# Altium PCB Drone_v1.0 - Copy.PcbDoc
Units mm, origin at the board's own origin, x right, y up, seen from the top; angles counter-clockwise.
Board outline 116.84 x 116.84 mm, 2 copper layers (Top Layer, Bottom Layer); 97 components, 66 nets, 314 pads, 83 vias.
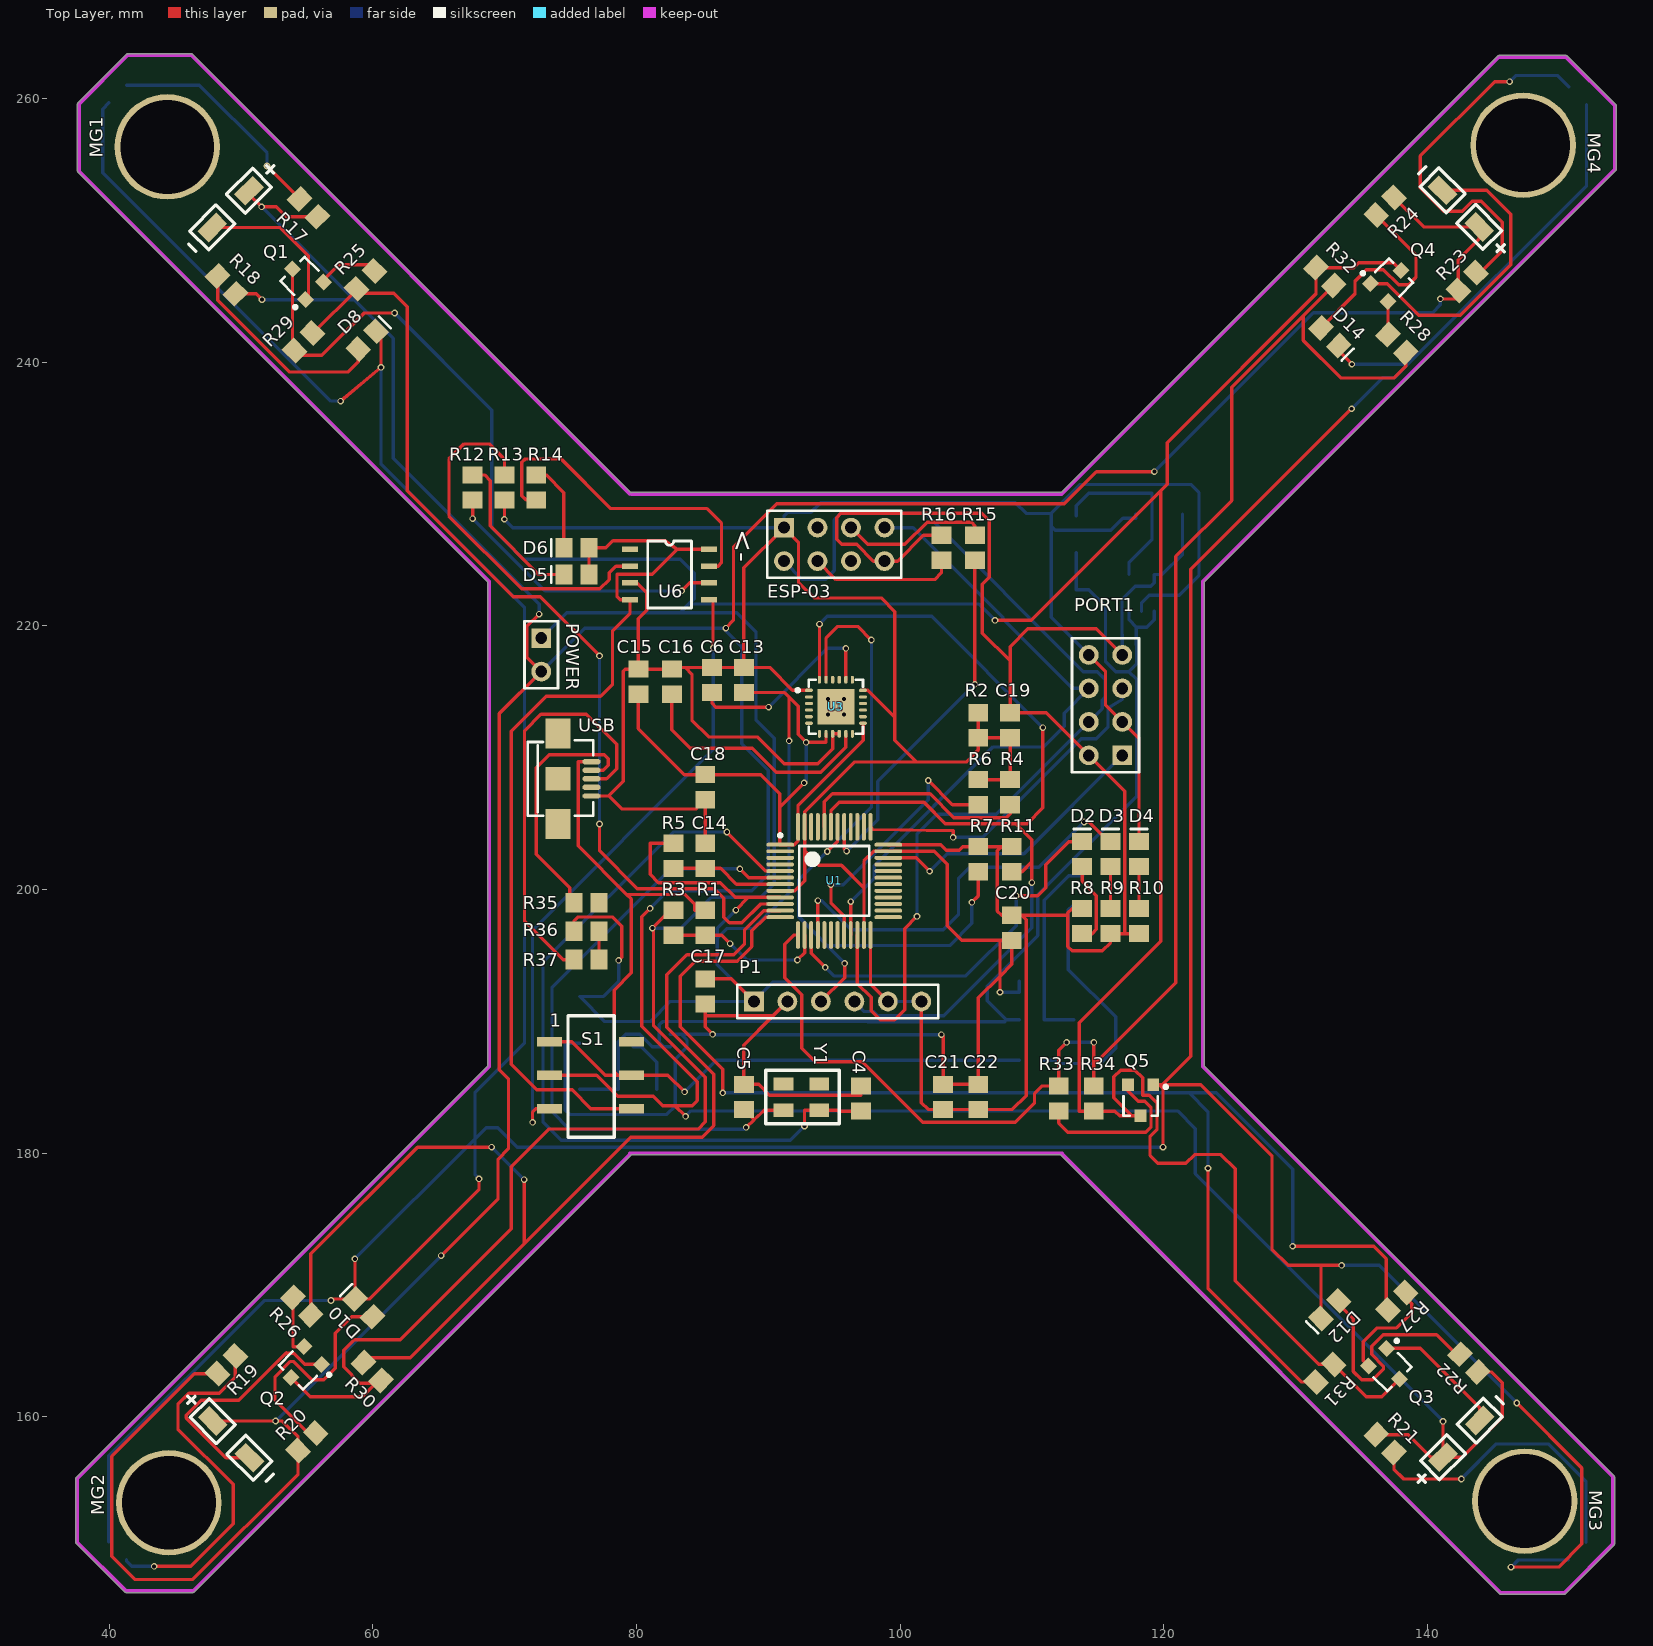
[diagram p0: Top Layer view]
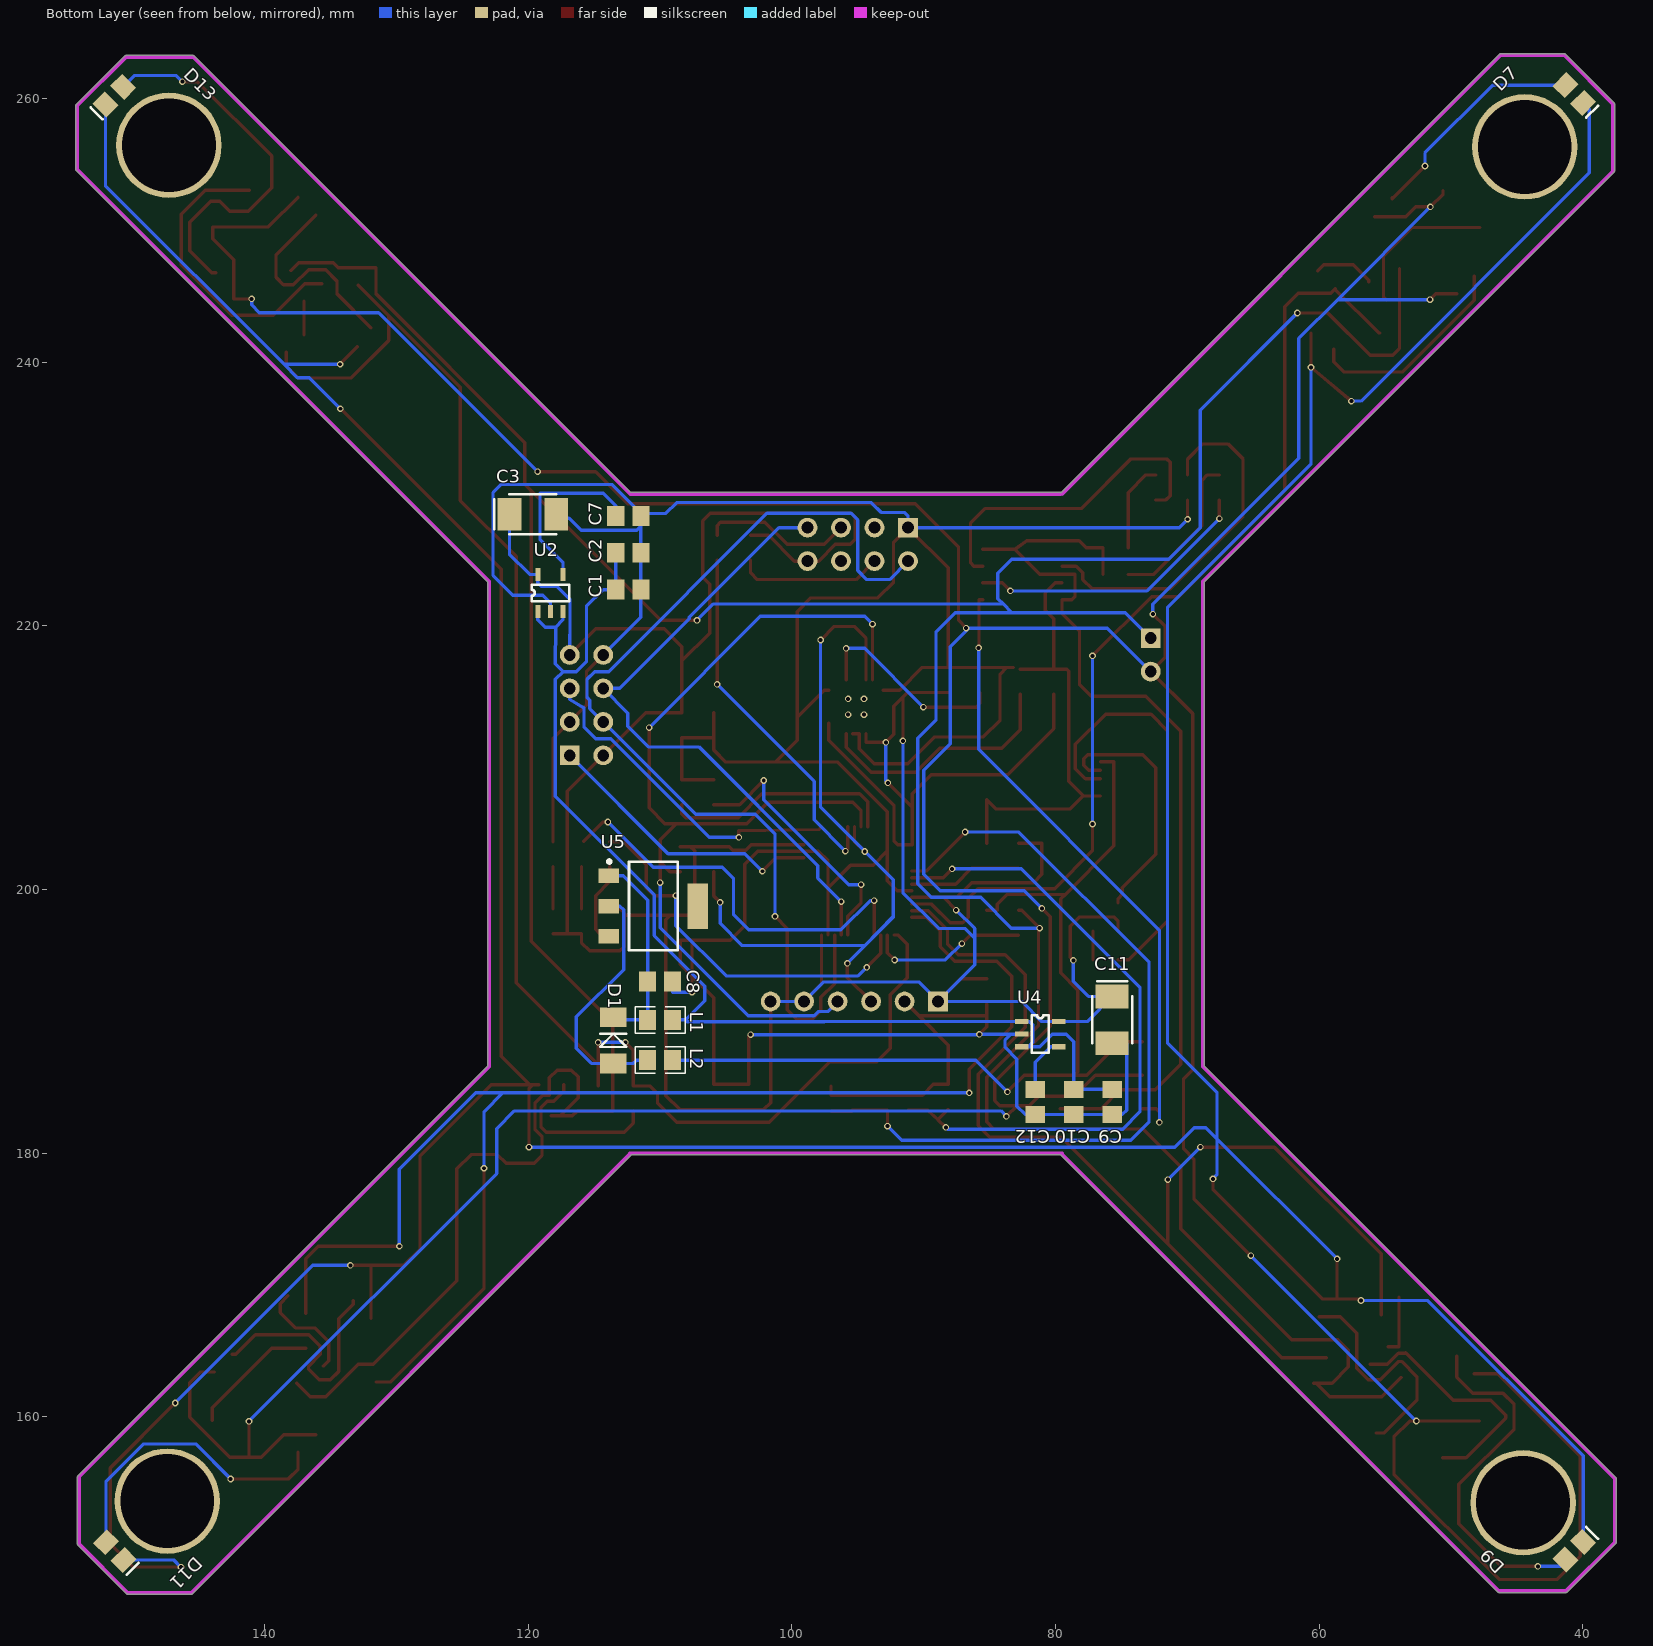
[diagram p1: Bottom Layer view, seen from below]

## Layer stack, top to bottom
Top Layer: signal copper 0.0356
Dielectric: dielectric 0.32, FR-4, Dk 4.8
Bottom Layer: signal copper 0.0356

## Board outline
41.185,146.722 37.502,150.405 37.502,150.404 cw(c37.592,150.495) 37.465,150.495 37.465,155.321 cw(c37.592,155.321) 37.502,155.412 37.502,155.411 68.707,186.616 68.707,223.34 37.629,254.418 37.629,254.417 cw(c37.719,254.508) 37.592,254.508 37.592,259.588 cw(c37.719,259.588) 37.629,259.679 37.629,259.678 41.312,263.361 41.311,263.361 cw(c41.402,263.271) 41.402,263.398 46.228,263.398 cw(c46.228,263.271) 46.319,263.361 46.318,263.361 46.319,263.361 79.569,230.111 cw(c79.632,230) 79.632,230.127 112.218,230.127 145.325,263.234 145.324,263.234 cw(c145.415,263.144) 145.415,263.271 150.495,263.271 cw(c150.495,263.144) 150.586,263.234 150.585,263.234 154.268,259.551 154.268,259.552 cw(c154.178,259.461) 154.305,259.461 154.305,254.635 cw(c154.178,254.635) 154.268,254.544 154.268,254.545 123.063,223.34 123.063,186.616 154.141,155.538 154.141,155.539 cw(c154.051,155.448) 154.178,155.448 154.178,150.368 cw(c154.051,150.368) 154.141,150.277 154.141,150.278 150.458,146.595 150.459,146.595 cw(c150.368,146.685) 150.368,146.558 145.542,146.558 cw(c145.542,146.685) 145.451,146.595 112.179,179.867 cw(c112.27,179.958) 112.175,179.873 79.596,179.873 cw(c79.502,179.959) 79.592,179.869 46.445,146.722 46.446,146.722 cw(c46.355,146.812) 46.355,146.685 41.275,146.685 cw(c41.275,146.812)

## Design rules (kind name [scope] priority, off if disabled: settings)
Clearance [All] p1: gap=0.2
PolygonConnect [All] p1: connectstyle=Relief reliefconductorwidth=0.254 reliefentries=4 polygonreliefangle="90 Angle" airgapwidth=0.254
RoutingVias [All] p1: holewidth=0.711 width=1.27 viastyle="Through Hole" minholewidth=0.711 minwidth=1.27 maxholewidth=0.711 maxwidth=1.27
SolderMaskExpansion [All] p1: expansion=0.102
Width [All] p1: maxlimit=0.254 minlimit=0.254 preferedwidth=0.254
28 further rules are at their usual default settings.

## Components (designator, comment, footprint, x,y, rotation, side; value= is the part's Value field where it differs from the comment)
C1 "0402 12pF" 0805-2 112.395,222.758 r180 bottom
C2 "0402 12pF" 0805-2 112.395,225.552 r180 bottom
C3 "Cap Pol" CAP-3528 119.634,228.473 r180 bottom
C4 "0402 12pF" 0805-2 97.028,184.15 r90 top
C5 "0402 12pF" 0805-2 88.138,184.277 r270 top
C6 "0402 12pF" 0805-2 85.725,215.9 r270 top
C7 "0402 12pF" 0805-2 112.395,228.346 r180 bottom
C8 "0402 12pF" 0805-2 109.982,193.04 r180 bottom
C9 "0402 12pF" 0805-2 75.692,183.896 r270 bottom
C10 "0402 12pF" 0805-2 78.613,183.896 r270 bottom
C11 "Cap Pol" CAP-3528 75.692,190.119 r270 bottom
C12 "0402 12pF" 0805-2 81.534,183.896 r270 bottom
C13 "0402 12pF" 0805-2 88.138,215.9 r90 top
C14 "Cap" 0805-2 85.217,202.565 r90 top
C15 "0402 12pF" 0805-2 80.137,215.773 r90 top
C16 "0402 12pF" 0805-2 82.677,215.773 r90 top
C17 "Cap" 0805-2 85.217,192.278 r90 top
C18 "Cap" 0805-2 85.217,207.772 r90 top
C19 "Cap" 0805-2 108.331,212.471 r90 top
C20 "Cap" 0805-2 108.458,197.104 r90 top
C21 "0402 12pF" 0805-2 103.251,184.277 r90 top
C22 "0402 12pF" 0805-2 105.918,184.277 r90 top
D1 "Diode" DIODE-1206 113.538,186.817 r90 bottom
D2 "LED0" LED_0805 113.792,202.692 r90 top
D3 "LED0" LED_0805 115.951,202.692 r90 top
D4 "LED0" LED_0805 118.11,202.692 r90 top
D5 "LED0" LED_0805 75.438,223.901 r180 top
D6 "LED0" LED_0805 75.438,225.933 r180 top
D7 "LED0" LED_0805 40.64,260.35 r225 bottom
D8 "LED0" LED_0805 59.563,241.681 r45 top
D9 "LED0" LED_0805 40.64,149.86 r135 bottom
D10 "LED0" LED_0805 59.309,168.275 r135 top
D11 "LED0" LED_0805 151.348,149.824 r225 bottom
D12 "LED0" LED_0805 132.588,168.148 r225 top
D13 "LED0" LED_0805 151.384,260.223 r315 bottom
D14 "LED0" LED_0805 132.588,241.935 r315 top
ESP-03 "ESP03" PCBComponent_1 91.186,224.917 r0 top (schematic designator Header)
L1 "Inductor" 0805-1 109.982,190.119 r180 bottom
L2 "Inductor" 0805-1 109.982,187.071 r180 bottom
MG1 "MOTOR AC" Motor 45.212,255.524 r315 top
MG2 "MOTOR AC" Motor 45.339,154.305 r45 top
MG3 "MOTOR AC" Motor 146.558,154.432 r135 top
MG4 "MOTOR AC" Motor 146.431,255.651 r225 top
P1 "BMP280" HDR1X6 88.9,191.516 r0 top
PORT1 "PORT" HDR2X4_CEN 116.84,210.185 r90 top
POWER "Header 2" HDR1X2 72.771,219.075 r270 top (schematic designator POWER1)
Q1 "MOSFET-N" SOT-23 54.737,246.253 r45 top
Q2 "MOSFET-N" SOT-23 54.61,163.83 r135 top
Q3 "MOSFET-N" SOT-23 137.033,163.703 r225 top
Q4 "MOSFET-N" SOT-23 137.16,246.126 r315 top
Q5 "MOSFET-N" SOT-23 118.237,184.023 r180 top
R1 "Res1" 0805-2 85.217,197.485 r90 top
R2 "Res1" 0805-2 105.918,212.471 r270 top
R3 "Res1" 0805-2 82.804,197.485 r90 top
R4 "Res1" 0805-2 108.331,207.391 r270 top
R5 "Res1" 0805-2 82.804,202.565 r90 top
R6 "Res1" 0805-2 105.918,207.391 r270 top
R7 "Res1" 0805-2 105.918,202.311 r270 top
R8 "Res1" 0805-2 113.792,197.612 r90 top
R9 "Res1" 0805-2 115.951,197.612 r270 top
R10 "Res1" 0805-2 118.11,197.612 r270 top
R11 "Res1" 0805-2 108.458,202.311 r270 top
R12 "Res1" 0805-2 67.564,230.505 r90 top
R13 "Res1" 0805-2 69.977,230.505 r90 top
R14 "Res1" 0805-2 72.39,230.505 r90 top
R15 "Res1" 0805-2 105.664,225.933 r90 top
R16 "Res1" 0805-2 103.124,225.933 r90 top
R17 "Res1" 0805-2 55.118,251.714 r135 top
R18 "Res1" 0805-2 48.895,245.872 r135 top
R19 "Res1" 0805-2 48.895,163.957 r45 top
R20 "Res1" 0805-2 54.991,158.115 r45 top
R21 "Res1" 0805-2 136.779,157.988 r315 top
R22 "Res1" 0805-2 143.129,164.084 r135 top
R23 "Res1" 0805-2 143.002,246.126 r45 top
R24 "Res1" 0805-2 136.779,251.841 r225 top
R25 "Res1" 0805-2 59.436,246.253 r225 top
R26 "Res1" 0805-2 54.61,168.402 r315 top
R27 "Res1" 0805-2 137.668,168.783 r225 top
R28 "Res1" 0805-2 137.668,241.427 r315 top
R29 "Res1" 0805-2 54.737,241.554 r45 top
R30 "Res1" 0805-2 59.944,163.449 r135 top
R31 "Res1" 0805-2 132.207,163.322 r225 top
R32 "Res1" 0805-2 132.207,246.507 r315 top
R33 "Res1" 0805-2 112.014,184.15 r90 top
R34 "Res1" 0805-2 114.681,184.15 r90 top
R35 "Res1" 0805-2 76.2,199.009 r180 top
R36 "Res1" 0805-2 76.2,196.85 r180 top
R37 "Res1" 0805-2 76.2,194.691 r180 top
S1 "Switch" 开关 74.803,181.229 r0 top
U1 "STM32F103C" LQFP-48_M 94.996,200.66 r0 top
U2 "MIC5219" SOT25-5 119.253,221.107 r90 bottom
U3 "MPU6050" QFN50P400X400X90-24N 95.123,213.868 r0 top
U4 "MIC5219" SOT25-5 82.55,189.992 r180 bottom
U5 "ME2108A" SOT-223 110.49,198.755 r270 bottom
U6 "TP4056" SOP8 79.502,225.806 r0 top
USB "USB_M" USB_MICRO 74.041,208.407 r270 top (schematic designator J1)
Y1 "Micro 3215" SMDXTAL3225 93.853,183.261 r180 top

## Footprints (in the part's own frame and the unit in brackets; to place one, negate y for a bottom-side part, rotate by r counter-clockwise, add the part's x,y. Pads: shape width x height; smd on the part's side, far side on the other; paste and mask are expansions set on the pad)
0805-1 [mm] "贴片带丝印"
  rect 1.3x1.5 smd: 1(-0.95,0) 2(0.95,0)
  silkscreen extent -1.91,-1.02 1.9,1.02, body extent -1.14,-0.51 1.14,0.51, height 1
0805-2 [mm] "贴片无丝印"
  rect 1.3x1.5 smd: 1(-0.95,0) 2(0.95,0)
CAP-3528 [mm] "钽电容"
  rect 1.8x2.5 smd: 1(-1.778,0) 2(1.778,0)
  silkscreen extent -2.92,-1.52 1.78,1.52, body extent -1.91,-1.4 1.91,1.4, height 1.1
DIODE-1206 [mm] "玻璃封装二极管"
  rect 1.5x2 smd: 1(0,0) 2(3.5,0)
  silkscreen extent 1.25,-1 2.25,1
HDR1X2 [mm] "Connector; Header; 2 Position"
  rect 1.5x1.5 hole 0.9: 1(0,0)
  round 1.5 hole 0.9: 2(2.54,0)
  silkscreen extent -1.27,-1.27 3.81,1.27
HDR1X6 [mm] "Connector; Header; 6 Position"
  rect 1.5x1.5 hole 0.9: 1(0,0)
  round 1.5 hole 0.9: 2(2.54,0) 3(5.08,0) 4(7.62,0) 5(10.16,0) 6(12.7,0)
  silkscreen extent -1.27,-1.27 13.97,1.27
HDR2X4_CEN [mm] "Connector; Header; 4x2 Position"
  rect 1.5x1.5 hole 0.9: 1(0,0)
  round 1.5 hole 0.9: 2(2.54,0) 3(5.08,0) 4(7.62,0) 5(0,2.54) 6(2.54,2.54) 7(5.08,2.54) 8(7.62,2.54)
  silkscreen extent -1.27,-1.27 8.89,3.81
LED_0805 [mm] "贴片二极管"
  rect 1.3x1.5 smd: 1(-0.95,0) 2(0.95,0)
  silkscreen extent 1.91,-0.63 1.91,0.64
LQFP-48_M [mm] "Thin QFP, 48-Leads, Body 7x7mm, Pitch 0.5mm, IPC Low Density"
  oval 2.1x0.3 smd: 1(-4.1,2.75) 2(-4.1,2.25) 3(-4.1,1.75) 4(-4.1,1.25) 5(-4.1,0.75) 6(-4.1,0.25) 7(-4.1,-0.25) 8(-4.1,-0.75) 9(-4.1,-1.25) 10(-4.1,-1.75) 11(-4.1,-2.25) 12(-4.1,-2.75) 25(4.1,-2.75) 26(4.1,-2.25) 27(4.1,-1.75) 28(4.1,-1.25) 29(4.1,-0.75) 30(4.1,-0.25) 31(4.1,0.25) 32(4.1,0.75) 33(4.1,1.25) 34(4.1,1.75) 35(4.1,2.25) 36(4.1,2.75)
  oval 0.3x2.1 smd: 13(-2.75,-4.1) 14(-2.25,-4.1) 15(-1.75,-4.1) 16(-1.25,-4.1) 17(-0.75,-4.1) 18(-0.25,-4.1) 19(0.25,-4.1) 20(0.75,-4.1) 21(1.25,-4.1) 22(1.75,-4.1) 23(2.25,-4.1) 24(2.75,-4.1) 37(2.75,4.1) 38(2.25,4.1) 39(1.75,4.1) 40(1.25,4.1) 41(0.75,4.1) 42(0.25,4.1) 43(-0.25,4.1) 44(-0.75,4.1) 45(-1.25,4.1) 46(-1.75,4.1) 47(-2.25,4.1) 48(-2.75,4.1)
  silkscreen extent -4.22,-2.65 2.65,3.57, body extent -3.5,-3.5 3.5,3.5, height 1.6
Motor [mm]
  round 8 hole 7.1: 0(-1.143,0)
  rect 1.2x2 smd: 1(5.588,2.032) 2(5.588,-1.905)
  silkscreen extent 4.57,-4.06 6.6,4.7
PCBComponent_1 [mm]
  rect 1.5x1.5 hole 0.9: 1(0,2.54)
  round 1.5 hole 0.9: 2(2.54,2.54) 3(5.08,2.54) 4(7.62,2.54) 5(7.62,0) 6(5.08,0) 7(2.54,0) 8(0,0)
  silkscreen extent -1.27,-1.27 8.89,3.81
QFN50P400X400X90-24N [mm] "QFN, 24-Leads, Body 4.1x4.1mm (max), Pitch 0.50mm, IPC Medium Density"
  oval 0.6x0.25 smd: 1(-2.05,1.25) 2(-2.05,0.75) 3(-2.05,0.25) 4(-2.05,-0.25) 5(-2.05,-0.75) 6(-2.05,-1.25) 13(2.05,-1.25) 14(2.05,-0.75) 15(2.05,-0.25) 16(2.05,0.25) 17(2.05,0.75) 18(2.05,1.25)
  oval 0.25x0.6 smd: 7(-1.25,-2.05) 8(-0.75,-2.05) 9(-0.25,-2.05) 10(0.25,-2.05) 11(0.75,-2.05) 12(1.25,-2.05) 19(1.25,2.05) 20(0.75,2.05) 21(0.25,2.05) 22(-0.25,2.05) 23(-0.75,2.05) 24(-1.25,2.05)
  rect 2.8x2.7 smd: 25(0,0)
  silkscreen extent -3.02,-2.05 2.05,2.05, body extent -2.05,-2.05 2.05,2.05, height 0.9
SMDXTAL3225 [mm]
  rect 1.5x1 smd: 1(0,0) 2(2.7,0) 3(2.7,-2) 4(0,-2)
  silkscreen extent -1.52,-3.05 4.06,1.02
SOP8 [mm]
  rect 1.2x0.42 smd: 1(0,0) 2(0,-1.27) 3(0,-2.54) 4(0,-3.81) 5(6,-3.81) 6(6,-2.54) 7(6,-1.27) 8(6,0)
  silkscreen extent 1.34,-4.44 4.67,0.64
SOT25-5 [mm]
  rect 1x0.4 smd: 1(0,0) 2(0,-0.95) 3(0,-1.9) 4(2.8,-1.9) 5(2.8,0)
  silkscreen extent 0.76,-2.38 2.03,0.48
SOT-23 [mm]
  rect 0.9x0.95 smd: 1(-0.95,-1.175) 2(0.95,-1.175) 3(0,1.175)
  silkscreen extent -2.03,-1.14 1.3,1.18
SOT-223 [mm]
  rect 1.1x1.55 smd: 1(-2.3,-3.375) 2(0,-3.375) 3(2.3,-3.375)
  rect 3.45x1.55 smd: 4(0,3.375)
  silkscreen extent -3.5,-3.48 3.35,1.85, body extent -3.3,-3.94 3.3,3.43, height 0.8
USB_MICRO [mm] "USB方孔"
  oct 0.4x1.35 smd: 1(-1.3,2.54) 2(-0.65,2.54) 3(0,2.54) 4(0.65,2.54) 5(1.3,2.54)
  rect 2.286x1.9 smd: 6(3.429,0) 7(-3.429,0)
  rect 1.8x1.9 smd: 8(0,0)
  silkscreen extent -2.92,-2.29 2.79,2.67
开关 [mm]
  rect 1.9x0.7 smd: 1(-1.397,7.239) 2(-1.397,4.699) 3(-1.397,2.159) 4(4.826,7.239) 5(4.826,4.699) 6(4.826,2.159)
  silkscreen extent 0,0 3.5,9.2

## Part data
C1 C2 C4 C5 C6 C7 C8 C9 C10 C12 C13 C15 C16 C21 C22: library part Cap, "Capacitor"
C3 C11: "极性电解电容"
C14 C17 C18 C19 C20: "无极性电容"
D1: "二极管"
D2 D3 D4 D5 D6 D7 D8 D9 D10 D11 D12 D13 D14: "发光二极管"
ESP-03: library part Hearder
L1 L2: "电感"
P1: library part "Header 6", "Header, 6-Pin"
PORT1: library part "Header 4X2A", "Header, 4-Pin, Dual row"
POWER: "Header, 2-Pin"
Q1 Q2 Q3 Q4 Q5: "N-Channel MOSFET"
R1 R2 R3 R4 R5 R6 R7 R8 R9 R10 R11 R12 R13 R14 R15 R16 R17 R18 R19 R20 R21 R22 R23 R24 R25 R26 R27 R28 R29 R30 R31 R32 R33 R34 R35 R36 R37: "贴片电阻"
S1: library part 双刀双柄开关
U1: "STM32单片机48引脚"
USB: "MicroUSB接口"
Y1: library part XTAL, "Crystal Oscillator"

## Via types
v1: diameter 0.5, hole 0.3, Top Layer to Bottom Layer, 79 vias
v2: diameter 0.5, hole 0.3, Top Layer to Bottom Layer, tented top, 4 vias

## Nets (pads, with @x,y where several pads share a name; then routed paths per layer and width w, separated by ;. In a path a pad name is that pad's centre, name@x,y a point inside that pad or via, vN(x,y) a via of type N, cw(c..) or ccw(c..) an arc to the next point about the centre after c; other vN are vias at no path point)
3V3: C3.1 C11.1 C13.1 C15.1 C17.2 C18.2 C19.2 C20.2 C21.1 C22.1 ESP-03.5 P1.1 P1.5 P1.6 PORT1.4 PORT1.5 R5.2 R7.1 R8.2 R9.2 R10.2 R11.1 R16.2 R36.2 U1.1 U1.9 U1.24 U1.36 U1.48 U2.5 U3.8 U3.13 U4.5 | length 290.4
  Top Layer w0.254: R36.2 75.25,197.612 75.568,197.93 78.168,197.93 78.867,197.231 78.867,194.869 v1(78.638,194.64) ; C15.1 80.137,212.217 83.632,208.722 C18.2 89.408,208.722 90.856,207.274 90.856,206.248 ; R5.2 81.026,203.515 81.026,201.168 81.661,200.533 86.36,200.533 87.483,199.41 88.488,199.41 ; C17.2 87.188,193.228 P1.1 ; v1(87.528,198.45) 88.488,199.41 ; C13.1 91.222,214.95 91.567,214.605 ; U1.9 88.488,199.41 ; v1(91.567,211.277) 91.567,214.605 ; v1(92.71,208.102) 90.856,206.248 ; U3.8 94.373,211.176 v1(92.862,211.176) 92.253,211.785 92.253,213.919 91.567,214.605 ; U3.13 97.18,212.618 97.18,211.328 92.246,206.394 U1.48 92.246,203.708 91.948,203.41 U1.1 90.856,203.41 90.856,206.248 ; U1.24 97.746,192.83 P1.5 ; U1.36 103.085,203.41 103.495,203 104.467,203 104.728,203.261 R7.1 107.681,203.261 ; P1.6 101.6,183.835 102.108,183.327 C21.1 C22.1 108.512,183.327 109.55,184.365 109.55,197.724 109.22,198.054 ; R16.2 101.763,226.883 99.797,224.917 ESP-03.5 97.968,224.917 96.698,226.187 95.555,226.187 95.174,226.568 95.174,228.219 95.504,228.549 106.172,228.549 106.756,227.965 106.756,223.698 106.223,223.164 106.223,219.456 108.331,217.348 ; R11.1 107.681,203.261 ; R8.2 113.03,198.562 112.7,198.232 112.7,198.054 ; PORT1.4 114.859,219.786 109.677,219.786 108.331,218.44 108.331,217.348 ; R10.2 117.028,196.662 ; 107.681,203.261 107.366,202.946 107.366,198.374 107.686,198.054 C20.2 109.22,198.054 ; 108.331,217.348 C19.2 111.064,213.421 PORT1.5 117.028,207.457 117.028,196.662 ; 109.22,198.054 112.7,198.054 ; 112.7,198.054 112.7,195.682 113.03,195.351 115.316,195.351 115.951,195.986 R9.2 117.028,196.662
  Bottom Layer w0.254: v1(78.638,194.64) 78.638,193.04 77.495,191.897 C11.1 77.597,189.992 U4.5 81.026,189.992 82.55,191.516 P1.1 ; v1(87.528,198.45) 86.131,197.053 86.131,196.317 ; v1(91.567,211.277) 91.567,199.771 88.849,197.053 86.868,197.053 86.131,196.317 ; v1(92.71,208.102) 92.862,208.255 v1(92.862,211.176) ; P1.6 P1.5 97.58,192.996 90.38,192.996 P1.1 ; PORT1.4 116.84,219.329 116.815,219.354 116.815,221.996 117.831,223.012 118.999,223.012 119.253,223.266 U2.5 119.888,223.907 121.412,225.431 C3.1 ; 86.131,196.317 86.131,194.285 P1.1
AGND: POWER.1 Q1.3 Q2.3 Q3.3 Q4.3 Q5.3 R3.2 R29.1 R30.1 R31.1 R32.1 R34.1 | length 339.1
  Top Layer w0.254: Q2.3 55.234,161.544 59.182,161.544 R30.1@60.198,162.56 ; Q1.3 53.906,241.041 R29.1 54.41,240.538 56.134,240.538 59.334,243.738 v1(61.646,243.738) ; R30.1@60.398,162.56 R30.1@60.198,162.56 ; R3.2 82.56,198.435 81.28,197.155 81.28,189.713 85.217,185.776 85.217,182.378 84.68,181.842 73.333,181.842 70.485,178.994 70.485,174.269 62.078,165.862 58.591,165.862 57.785,165.056 57.785,163.793 59.018,162.56 R30.1@60.198,162.56 ; v1(107.188,220.421) 109.927,220.421 119.761,230.255 ; Q5.3 117.558,182.848 ; Q3.3@137.541,162.56 136.525,161.544 135.328,161.544 R31.1 131.738,163.994 125.4,170.332 125.4,178.816 124.308,179.908 122.326,179.908 121.666,179.248 119.532,179.248 118.948,179.832 118.948,181.305 119.478,181.835 119.478,183.79 118.872,184.396 118.389,184.396 118.389,185.725 117.805,186.309 116.713,186.309 116.205,185.801 116.205,184.201 117.558,182.848 ; Q4.3 137.405,247.542 134.772,247.542 134.409,247.179 R32.1 131.535,245.186 120.24,233.891 120.24,230.734 119.761,230.255 ; 117.558,182.848 116.633,182.848 116.281,183.2 R34.1 113.589,183.2 113.589,189.916 119.761,196.088 119.761,230.255
  Bottom Layer w0.254: v1(61.646,243.738) 69.012,236.372 69.012,227.457 71.399,225.069 83.312,225.069 84.379,224.003 84.379,222.072 83.975,221.669 ; POWER.1 74.701,221.005 83.312,221.005 ; v1(81.204,197.079) 83.337,197.079 85.674,199.415 89.408,199.415 90.449,200.457 90.449,211.487 89.056,212.881 89.056,219.554 87.605,221.005 83.312,221.005 ; v1(107.188,220.421) 105.941,221.669 83.975,221.669 ; 83.312,221.005 83.975,221.669
BAT: MG1.1 MG2.1 MG3.1 MG4.1 POWER.2 R17.1 R18.1 R19.1 R20.1 R21.1 R22.1 R23.1 R24.1 S1.2 | length 419
  Top Layer w0.254: MG2.1 v1(52.629,159.693) 53.122,159.693 54.319,158.496 R20.1 54.319,155.665 46.33,147.676 41.935,147.676 40.183,149.428 40.183,157.005 46.463,163.285 R19.1 ; R18.1 51.142,245.2 v1(51.587,244.754) ; MG1.1 50.6,252.749 v1(51.559,251.79) 52.68,251.79 53.428,251.042 R17.1 ; v1(65.173,172.237) 69.494,176.559 69.494,179.553 70.282,180.34 70.282,185.649 69.596,186.334 69.596,213.36 POWER.2 71.679,217.627 71.679,219.964 v1(72.613,220.898) ; S1.2 76.962,185.928 78.562,184.328 81.28,184.328 81.991,183.617 82.906,183.617 ; v1(81.026,198.577) 80.391,197.942 80.391,189.628 84.604,185.415 84.604,184 84.221,183.617 82.906,183.617 ; v1(83.718,182.804) 82.906,183.617 ; v1(86.766,219.837) 87.351,220.421 87.351,225.984 90.627,229.26 112.446,229.26 114.884,231.699 v1(119.278,231.699) ; R21.1 138.52,158.66 140.233,156.946 MG3.1 ; R24.1 139.701,250.263 MG4.1 143.917,249.377 142.33,247.791 R23.1 142.33,244.805 v1(140.97,244.805) ; v1(141.17,159.671) MG3.1 ; R22.1 144.842,163.412 145.669,162.585 145.669,159.995 142.621,156.946 MG3.1
  Bottom Layer w0.254: v1(51.559,251.79) 58.594,244.754 ; v1(51.587,244.754) 58.594,244.754 ; v1(52.629,159.693) v1(65.173,172.237) ; v1(72.613,220.898) 72.613,221.646 61.544,232.715 61.544,241.805 58.594,244.754 ; POWER.2 76.073,219.837 v1@86.589,219.837 ; v1(81.026,198.577) 82.369,199.92 88.744,199.92 89.992,201.168 89.992,209.067 87.986,211.074 87.986,218.44 v1@86.589,219.837 ; v1(83.718,182.804) 84.125,183.21 121.031,183.21 122.377,181.864 122.377,178.464 v1(141.17,159.671) ; v1(86.766,219.837) v1@86.589,219.837 ; v1(119.278,231.699) 131.343,243.764 140.386,243.764 140.97,244.348 v1(140.97,244.805)
CBAT: S1.3 U6.5 | length 47.8
  Top Layer w0.254: v1(72.111,182.347) 72.111,183.134 72.365,183.388 S1.3 ; U6.5 85.801,221.996 85.801,218.364 v1(85.827,218.338)
  Bottom Layer w0.254: v1(72.111,182.347) 72.111,196.926 85.827,210.642 v1(85.827,218.338)
GND: C1.2 C2.2 C3.2 C4.2 C5.1 C6.1 C7.2 C8.2 C9.2 C10.2 C11.2 C12.2 C13.2 C14.2 C15.2 C16.2 C17.1 C18.1 C19.1 C20.1 C21.2 C22.2 D4.2 ESP-03.1 P1.2 PORT1.2 PORT1.8 R2.1 R2.2 R4.1 R6.1 R13.1 U1.8 U1.23 U1.35 U1.47 U2.2 U3.1 U3.9 U3.10 U3.18 U4.2 U6.3 USB.5 | length 360.3
  Top Layer w0.254: v1(69.977,228.092) R13.1 ; USB.5 77.872,207.107 ; U6.3 80.01,223.266 80.772,222.504 80.772,221.183 80.137,220.548 C15.2 ; C16.2 C15.2 ; C16.2@83.185,216.85 C6.1 C13.2 ; 83.724,216.82 84.201,216.342 84.201,212.852 85.471,211.582 89.157,211.582 91.189,209.55 93.755,209.55 94.873,210.668 U3.9 U3.10 ; C17.1 85.217,190.424 ; C14.2 C18.1 84.516,206.121 78.858,206.121 77.872,207.107 ; v1@85.776,189.001 v1(85.776,189.027) 85.217,189.586 85.217,190.424 ; U1.8 91.996,199.91 92.746,200.66 92.746,202.935 ; P1.2 90.348,190.424 ; U3.1 91.826,215.118 90.094,216.85 C13.2 ; C4.2 97.028,184.404 90.079,184.404 89.256,185.227 C5.1 88.138,188.214 90.348,190.424 ; U3.18 97.536,215.118 99.593,213.061 ; U1.23 97.246,200.152 ; 101.244,209.677 99.593,211.328 99.593,213.061 ; v1(103.124,189.001) 103.251,188.874 C21.2 C22.2 105.918,191.795 107.569,193.446 ; R6.1 R4.1 C19.1 R2.2 ; R2.1 R2.2 ; v1(107.569,192.217) 107.569,193.446 ; PORT1.8 115.57,216.535 115.57,213.995 PORT1.2 118.11,211.455 D4.2 ; 77.872,207.107 78.994,208.229 78.994,216.571 79.146,216.723 C15.2 ; 85.217,190.424 90.348,190.424 ; C13.2 88.138,224.409 ESP-03.1 92.278,226.365 92.278,223.317 93.472,222.123 98.552,222.123 99.593,221.082 99.593,213.061 ; 92.746,202.935 U1.47 92.746,205.903 96.52,209.677 105.004,209.677 105.918,210.591 R2.2 ; 92.746,202.935 93.828,201.854 95.544,201.854 97.246,200.152 ; 97.246,200.152 97.246,202.173 97.983,202.91 U1.35 102.576,202.91 103.556,201.93 103.556,197.246 104.648,196.154 107.569,196.154 ; 107.569,193.446 107.569,196.154 ; 107.569,193.446 108.458,194.335 C20.1 107.569,196.154
  Bottom Layer w0.254: v1(69.977,228.092) 70.612,227.457 ESP-03.1 91.186,228.346 91.44,228.6 93.193,228.6 93.955,229.362 108.712,229.362 109.542,228.532 C7.2@111.445,228.532 ; C11.2 74.6,188.341 74.6,183.276 74.93,182.946 C9.2 C10.2 C12.2 82.296,182.946 82.931,183.581 82.931,187.147 83.82,188.036 83.82,188.595 83.373,189.042 ; U4.2 83.373,189.042 ; v1@85.761,189.042 83.373,189.042 ; v1@85.776,189.001 v1(103.124,189.001) ; v1(107.569,192.217) 109.032,192.217 C8.2 ; PORT1.8 111.445,220.66 C1.2 C2.2 111.445,227.569 ; C3.2 117.856,228.168 116.891,228.168 115.976,227.254 111.76,227.254 111.445,227.569 ; U2.2 118.303,221.757 118.872,222.326 121.158,222.326 122.657,223.825 122.657,230.124 122.046,230.734 113.647,230.734 C7.2@111.445,228.532 ; 111.445,227.569 C7.2 C7.2@111.445,228.532
KEY: R15.1 U1.41 | length 28
  Top Layer w0.254: U1.41 95.746,203.11 v1(95.936,202.921) ; v1(105.664,215.57) R15.1
  Bottom Layer w0.254: v1(95.936,202.921) 98.298,205.283 98.298,208.204 v1(105.664,215.57)
LED1: D2.2 U1.15 | length 29.2
  Top Layer w0.254: U1.15 93.246,195.174 v1(94.31,194.109) ; v1(108.788,199.542) 110.414,199.542 111.023,200.152 111.023,201.889 112.776,203.642 D2.2
  Bottom Layer w0.254: v1(94.31,194.109) 94.97,193.45 104.981,193.45 108.788,197.256 v1(108.788,199.542)
LED2: D3.2 U1.16 | length 31.1
  Top Layer w0.254: U1.16 v1(93.746,199.161) ; v1(113.944,205.13) 114.3,205.13 D3.2@115.773,203.657
  Bottom Layer w0.254: v1(93.746,199.161) 94.056,199.161 96.266,196.952 103.253,196.952 104.422,198.12 104.422,200.862 105.261,201.701 110.515,201.701 v1(113.944,205.13)
LED_EN: U1.45
NetC1_1: C1.1 C2.1 C9.1 C10.1 L1.2 U2.1 U2.3 U4.1 U4.3 | length 91.4
  Bottom Layer w0.254: C9.1 C10.1 78.613,188.468 79.172,189.027 80.244,189.027 81.178,188.092 82.042,188.092 ; U4.3 82.042,188.092 ; L1.2 108.052,190.119 ; C2.1 C1.1 114.3,222.758 115.57,221.488 115.57,217.297 116.332,216.535 117.348,216.535 ; U2.3 117.353,220.472 117.912,219.913 ; U2.1 119.253,220.472 118.694,219.913 117.912,219.913 ; 82.042,188.092 81.712,188.422 81.712,189.738 81.966,189.992 U4.1 97.529,189.992 97.536,189.985 107.918,189.985 108.052,190.119 ; 108.052,190.119 106.607,191.564 106.607,192.688 110.439,196.52 110.439,199.593 117.932,207.086 117.932,215.951 117.348,216.535 ; 117.348,216.535 117.932,217.119 117.912,219.913
NetC6_2: C6.2 U3.20 | length 15.3
  Top Layer w0.254: C6.2 85.725,214.122 86.004,213.843 v1(90.018,213.843) ; U3.20 v1(95.873,218.301)
  Bottom Layer w0.254: v1(90.018,213.843) 94.476,218.301 v1(95.873,218.301)
NetC7_1: C7.1 U2.4 | length 13.8
  Bottom Layer w0.254: C7.1 113.345,229.118 114.3,230.073 119.101,230.073 119.101,226.568 117.353,224.82 U2.4
NetC8_1: C8.1 D1.2 L1.1 U5.1 | length 15
  Bottom Layer w0.254: D1.2@113.157,190.119 L1.1 C8.1 110.932,199.211 112.776,201.055 U5.1
NetC12_1: C12.1 U4.4 | length 4.3
  Bottom Layer w0.254: U4.4 80.361,188.092 81.534,186.919 C12.1
NetC16_1: C16.1 U3.11 | length 19
  Top Layer w0.254: C16.1 82.677,212.115 84.071,210.722 88.778,210.722 90.585,208.915 93.98,208.915 95.873,210.808 U3.11
NetD1_1: D1.1 L2.1 U5.2 | length 19.2
  Bottom Layer w0.254: L2.1 111.757,187.071 112.011,186.817 D1.1 115.192,186.817 116.335,187.96 116.335,190.345 112.751,193.929 112.751,198.476 113.03,198.755 U5.2
NetD2_1: D2.1 R8.1 | length 6.4
  Top Layer w0.254: R8.1 114.554,196.662 114.869,196.977 114.869,199.542 113.792,200.619 D2.1
NetD3_1: D3.1 R9.1 | length 3.2
  Top Layer w0.254: R9.1 D3.1
NetD4_1: D4.1 R10.1 | length 3.2
  Top Layer w0.254: R10.1 D4.1
NetD5_2: D5.2 R12.2 | length 12.1
  Top Layer w0.254: R12.2 68.468,231.455 68.893,231.03 68.893,227.584 72.576,223.901 D5.2
NetD6_2: D6.2 R14.2 | length 6.8
  Top Layer w0.254: R14.2 73.152,231.455 74.488,230.119 D6.2
NetD7_1: D7.1 R17.2 | length 17.3
  Top Layer w0.254: v1(51.968,254.887) 54.379,252.476 54.446,252.476 R17.2
  Bottom Layer w0.254: D7.1 46.826,261.022 51.968,255.88 v1(51.968,254.887)
NetD7_2: D7.2 D8.2 D9.2 D10.2 D11.2 D12.2 D13.2 D14.2 Q5.1 | length 386.3
  Top Layer w0.254: v1(56.82,168.834) 56.933,168.947 D10.2 ; v1(57.557,237.059) v1(60.616,239.612) D8.2@60.616,242.226 ; v1(58.637,171.997) D10.2 ; v1(68.05,178.06) 68.05,177.27 59.727,168.947 D10.2 ; Q5.1 119.646,185.198 ; v1(119.932,180.467) 119.932,184.912 119.646,185.198 ; D12.2 131.916,171.501 ; D14.2@132.969,241.173 134.29,239.852 v1(134.255,239.852) ; v1(133.477,171.501) 131.916,171.501 ; v1@134.226,236.487 122.047,224.307 122.047,187.357 119.888,185.198 ; v1(146.329,148.615) 149.941,148.615 151.693,150.368 151.693,156.129 v1(146.761,161.061) ; 119.646,185.198 119.888,185.198 ; 119.888,185.198 122.802,185.198 128.194,179.807 128.194,172.72 129.413,171.501 131.916,171.501
  Bottom Layer w0.254: D9.2 39.968,157.055 51.747,168.834 v1(56.82,168.834) ; D7.2 39.497,259.207 39.497,254.381 56.819,237.059 v1(57.557,237.059) ; v1(58.637,171.997) 67.748,181.107 ; v1(60.616,239.612) 60.616,232.253 71.501,221.368 71.501,188.392 67.748,184.638 67.748,181.107 ; v1(68.05,178.06) 67.748,178.363 67.748,181.107 ; v1(119.932,180.467) 70.938,180.467 69.466,181.94 68.58,181.94 67.748,181.107 ; v1(133.477,171.501) 136.322,171.501 v1(146.761,161.061) ; v1(134.239,236.474) 136.601,238.836 137.49,238.836 138.506,239.852 ; v1(134.255,239.852) 138.506,239.852 ; v1(146.329,148.615) 146.866,149.152 D11.2 ; D13.2 152.056,253.402 138.506,239.852
NetD8_1: D8.1 R18.2 | length 16.1
  Top Layer w0.254: R18.2 48.223,244.69 53.645,239.268 58.129,239.268 58.891,240.03 D8.1
NetD9_1: D9.1 R19.2 | length 27.3
  Top Layer w0.254: v1(43.409,148.666) 46.177,148.666 49.403,151.892 49.403,154.889 45.212,159.08 45.212,160.96 46.05,161.798 48.336,161.798 49.567,163.029 R19.2
  Bottom Layer w0.254: D9.1 41.312,149.064 41.709,148.666 v1(43.409,148.666)
NetD10_1: D10.1 R20.2 | length 17.9
  Top Layer w0.254: R20.2 55.067,158.787 52.578,161.276 52.578,163.043 53.746,164.211 53.975,164.211 55.372,162.814 56.262,162.814 57.15,163.702 57.15,166.345 58.408,167.603 D10.1
NetD11_1: D11.1 R21.2 | length 23
  Top Layer w0.254: R21.2 137.451,156.046 138.201,155.296 v1(142.557,155.296)
  Bottom Layer w0.254: v1(142.557,155.296) 145.212,157.951 149.159,157.951 152.019,155.09 D11.1
NetD12_1: D12.1 R22.2 | length 18.5
  Top Layer w0.254: D12.1 133.26,168.557 134.366,167.451 134.366,163.449 135.001,162.814 135.839,162.814 136.652,163.627 136.652,163.855 135.763,164.744 135.763,165.379 136.627,166.243 140.677,166.243 142.164,164.756 R22.2
NetD13_1: D13.1 R23.2 | length 29.3
  Top Layer w0.254: R23.2 144.004,246.798 145.669,248.463 145.669,250.635 144.082,252.222 143.383,252.222 142.621,251.46 141.237,251.46 139.446,253.251 139.446,255.651 145.085,261.29 v1(146.228,261.29)
  Bottom Layer w0.254: v1(146.228,261.29) 146.685,261.747 149.86,261.747 D13.1
NetD14_1: D14.1 R24.2 | length 16.3
  Top Layer w0.254: D14.1 134.493,245.184 134.493,246.151 135.357,247.015 136.652,247.015 137.795,245.872 138.557,245.872 139.116,246.431 139.116,248.158 136.107,251.167 R24.2
NetHeader_3: ESP-03.3 R15.2 | length 11.5
  Top Layer w0.254: ESP-03.3 97.536,226.187 100.355,226.187 102.032,227.863 105.41,227.863 105.664,227.609 R15.2
NetHeader_7: ESP-03.7 R16.1 | length 11.1
  Top Layer w0.254: ESP-03.7 95.123,223.52 102.616,223.52 103.124,224.028 R16.1
NetJ1_2: R35.2 USB.2 | length 19.4
  Top Layer w0.254: R35.2 75.25,199.324 74.93,199.644 74.93,200.152 72.39,202.692 72.39,209.26 73.366,210.236 77.546,210.236 77.851,209.931 77.851,209.423 77.485,209.057 USB.2
NetJ1_3: R37.2 USB.3 | length 31.9
  Top Layer w0.254: R37.2 74.422,194.691 71.501,197.612 71.501,212.065 72.746,213.309 76.2,213.309 78.486,211.023 78.486,209.169 77.724,208.407 USB.3
NetMG1_2: MG1.2 Q1.1 | length 11.6
  Top Layer w0.254: MG1.2 52.93,250.226 55.118,248.038 55.118,244.972 Q1.1
NetMG2_2: MG2.2 Q2.1 | length 18.8
  Top Layer w0.254: MG2.2 48.856,156.909 45.847,159.918 45.847,160.122 46.99,161.265 49.835,161.265 53.442,164.871 ; 53.467,164.846 53.982,164.846 54.839,163.989 Q2.1
NetMG3_2: MG3.2 Q3.1 | length 9.9
  Top Layer w0.254: Q3.1 139.442,165.206 143.954,160.694 MG3.2
NetMG4_2: MG4.2 Q4.1 | length 23
  Top Layer w0.254: Q4.1 136.938,245.967 139.336,243.569 142.469,243.569 146.304,247.403 146.304,251.219 144.476,253.047 MG4.2
NetQ1_2: Q1.2 R25.1 | length 4.7
  Top Layer w0.254: Q1.2 56.24,246.213 57.423,247.396 59.636,247.396 R25.1
NetQ2_2: Q2.2 R26.1 | length 4.6
  Top Layer w0.254: R26.1 53.938,165.333 Q2.2
NetQ3_2: Q3.2 R27.1 | length 8.1
  Top Layer w0.254: Q3.2 135.128,164.264 135.128,165.714 136.165,166.751 137.643,166.751 138.811,167.919 138.811,168.602 R27.1@138.213,169.201
NetQ4_2: Q4.2 R28.1 | length 2.5
  Top Layer w0.254: R28.1 136.996,243.357 137.001,243.362 Q4.2
NetQ5_2: Q5.2 R33.1 | length 12.6
  Top Layer w0.254: R33.1 112.014,182.296 112.7,181.61 118.611,181.61 119.024,182.023 119.024,183.464 118.547,183.942 118.039,183.942 117.287,184.694 Q5.2
NetR1_1: R1.1 R3.1 U1.14 | length 12.3
  Top Layer w0.254: R3.1 R1.1 86.472,196.535 v1(87.097,195.91) ; v1(92.202,194.666) 92.746,195.21 U1.14
  Bottom Layer w0.254: v1(87.097,195.91) 88.341,194.666 v1(92.202,194.666)
NetR4_2: R4.2 U1.44 | length 17.8
  Top Layer w0.254: U1.44 94.246,206.654 94.856,207.264 102.26,207.264 104.06,205.464 108.055,205.464 108.331,205.74 R4.2
NetR6_2: R6.2 U1.20 | length 20.3
  Top Layer w0.254: v1(94.742,200.381) 94.742,198.997 95.746,197.993 U1.20 ; v1(102.123,208.28) 103.962,206.441 R6.2
  Bottom Layer w0.254: v1(94.742,200.381) 95.682,200.381 102.123,206.822 v1(102.123,208.28)
NetR12_1: R12.1 U6.6 | length 21.9
  Top Layer w0.254: v1(67.564,228.143) R12.1 ; v1(83.414,222.656) 84.023,223.266 U6.6
  Bottom Layer w0.254: v1(67.564,228.143) 73.05,222.656 v1(83.414,222.656)
NetR13_2: R13.2 U6.2 | length 27.7
  Top Layer w0.254: R13.2 69.977,232.664 68.834,233.807 66.91,233.807 65.767,232.664 65.767,228.339 71.298,222.809 77.216,222.809 77.927,223.52 77.927,224.028 78.435,224.536 U6.2
NetR14_1: R14.1 U6.7 | length 25.1
  Top Layer w0.254: R14.1 71.613,229.555 71.298,229.87 71.298,232.41 71.552,232.664 74.295,232.664 78.054,228.905 85.344,228.905 86.436,227.813 86.436,224.79 86.182,224.536 U6.7
OSC1: C4.1 U1.5 Y1.1 | length 61.8
  Top Layer w0.254: v1(86.843,204.368) 89.801,201.41 U1.5 ; v1(92.735,182.067) 92.735,183.261 Y1.1 95.402,183.261 95.463,183.2 C4.1
  Bottom Layer w0.254: v1(86.843,204.368) 82.77,204.368 72.898,194.497 72.898,182.397 74.294,181 91.669,181 v1(92.735,182.067)
OSC2: C5.2 U1.6 Y1.2 | length 50.5
  Top Layer w0.254: v1(87.833,201.574) 88.498,200.91 U1.6 ; C5.2 88.908,182.557 ; v1(88.316,181.966) 88.908,182.557 ; Y1.2 89.677,183.261 88.908,182.557
  Bottom Layer w0.254: v1(87.833,201.574) 82.575,201.574 73.589,192.588 73.589,183.133 74.896,181.826 88.176,181.826 v1(88.316,181.966)
OTG_FS_DM: R35.1
OTG_FS_DP: R36.1 R37.1 | length 2.2
  Top Layer w0.254: R37.1 R36.1
PWM1: R25.2 R29.2 U1.10 | length 75.1
  Top Layer w0.254: R29.2 55.479,242.226 58.764,245.511 R25.2 59.109,245.237 61.595,245.237 62.611,244.221 62.611,230.258 70.644,222.225 72.695,222.225 v1(77.191,217.729) ; v1(77.191,204.978) 77.191,202.949 80.061,200.079 85.872,200.079 86.614,199.337 86.614,197.917 87.043,197.488 87.989,197.488 89.411,198.91 U1.10
  Bottom Layer w0.254: v1(77.191,204.978) v1(77.191,217.729)
PWM2: R26.2 R30.2 U1.11 | length 87.9
  Top Layer w0.254: R26.2 55.282,172.369 63.383,180.47 v1(69.012,180.47) ; R30.2@59.436,164.502 62.844,164.502 71.476,173.134 ; v1(71.476,178.006) 71.476,173.134 ; U1.11 89.647,198.41 88.189,196.952 88.189,195.885 87.376,195.072 83.82,195.072 82.296,193.548 82.296,189.561 85.852,186.005 85.852,182.105 84.976,181.229 79.571,181.229 71.476,173.134
  Bottom Layer w0.254: v1(69.012,180.47) v1(71.476,178.006)
PWM3: R27.2 R31.2 U1.12 | length 110
  Top Layer w0.254: v1(86.538,184.582) 86.538,186.385 83.312,189.611 83.312,193.421 84.455,194.564 87.63,194.564 88.748,195.682 88.748,196.869 89.789,197.91 U1.12 ; v1(123.342,178.867) 123.342,169.748 130.44,162.65 R31.2 ; v1(129.769,172.949) 135.908,172.949 136.869,171.988 R27.2@136.869,167.857
  Bottom Layer w0.254: v1(86.538,184.582) 121.92,184.582 ; v1(123.342,178.867) 123.342,183.159 121.92,184.582 ; v1(129.769,172.949) 129.769,178.791 123.977,184.582 121.92,184.582
PWM4: R28.2 R32.2 R33.2 R34.2 U1.13 | length 121
  Top Layer w0.254: U1.13 91.948,196.56 91.237,195.849 91.237,193.319 92.532,192.024 92.532,187.96 93.548,186.944 97.104,186.944 101.702,182.347 108.712,182.347 110.185,183.82 110.185,184.541 110.744,185.1 R33.2 112.014,187.808 v1(112.624,188.417) ; R34.2 114.681,186.715 ; v1(114.681,188.417) 114.681,186.715 ; R32.2 130.556,243.513 ; R28.2 138.34,239.686 137.465,238.811 133.398,238.811 130.556,241.652 130.556,243.513 ; 114.681,186.715 120.904,192.938 120.904,225.271 125.146,229.513 125.146,238.102 130.556,243.513
  Bottom Layer w0.254: v1(112.624,188.417) v1(114.681,188.417)
RST: C14.1 R5.1 U1.7 | length 8.6
  Top Layer w0.254: R5.1 C14.1 86.37,201.615 87.575,200.41 U1.7
SCL: P1.3 R7.2 U1.42 U3.23 | length 60.4
  Top Layer w0.254: P1.3 95.783,193.319 v1(95.783,194.412) ; U3.23 94.373,219.087 95.25,219.964 96.784,219.964 v1(97.815,218.933) ; v1(94.463,202.895) 95.246,203.679 U1.42 ; v1(105.435,199.034) 105.918,199.517 R7.2
  Bottom Layer w0.254: v1(95.783,194.412) 94.45,195.745 ; v1(97.815,218.933) 97.815,206.248 v1(94.463,202.895) 92.307,200.739 92.307,197.964 ; v1(105.435,199.034) 105.435,197.434 103.784,195.783 94.45,195.745 ; 92.307,197.964 92.307,197.888 94.45,195.745 ; 92.307,197.964 94.45,195.745
SDA: P1.4 R11.2 U1.43 U3.24 | length 76.7
  Top Layer w0.254: U3.24 v1(93.873,220.142) ; U1.43 94.746,205.994 95.381,206.629 101.801,206.629 103.42,205.01 108.756,205.01 ; R11.2 109.235,201.361 109.982,202.108 ; v1(109.982,200.533) 109.982,202.108 ; v1(110.82,212.293) 110.82,206.197 109.633,205.01 108.756,205.01 ; 108.756,205.01 109.982,203.784 109.982,202.108
  Bottom Layer w0.254: v1(93.873,220.142) 94.457,220.726 102.387,220.726 v1(110.82,212.293) ; P1.4 97.282,190.754 97.993,190.754 98.308,190.439 103.317,190.439 109.982,197.104 v1(109.982,200.533)
SWCLK: PORT1.3 U1.37 | length 25.6
  Top Layer w0.254: U1.37 97.914,204.556 104.013,204.47 v1(104.013,203.962)
  Bottom Layer w0.254: v1(104.013,203.962) 106.248,203.962 113.741,211.455 114.874,211.455 115.763,212.344 115.763,213.792 116.84,214.427 PORT1.3
SWDIO: PORT1.1 U1.34 | length 21.8
  Top Layer w0.254: U1.34 101.219,202.41 v1(102.235,201.394)
  Bottom Layer w0.254: v1(102.235,201.394) 103.572,202.731 109.386,202.731 PORT1.1
USART3_RX: ESP-03.8 PORT1.6 U1.22 | length 77.8
  Top Layer w0.254: U1.22 96.746,192.875 97.79,191.831 97.79,190.815 98.486,190.119 99.568,190.119 100.33,190.881 100.33,197.028 v1(101.27,197.968)
  Bottom Layer w0.254: ESP-03.8 92.583,223.52 94.31,223.52 94.996,224.206 94.996,228.041 95.504,228.549 101.879,228.549 113.894,216.535 114.935,216.535 115.531,215.939 115.531,214.591 115.309,214.369 115.309,213.734 PORT1.6 107.283,205.708 102.775,205.708 101.27,204.203 v1(101.27,197.968)
USART3_TX: ESP-03.4 PORT1.7 U1.21 | length 49.1
  Top Layer w0.254: U1.21 v1(96.246,199.092)
  Bottom Layer w0.254: v1(96.246,199.092) 98.034,200.879 98.034,201.818 107.036,210.82 110.871,210.82 112.426,212.375 112.426,213.391 PORT1.7 113.03,215.265 107.765,220.53 107.765,220.66 100.968,227.457 ESP-03.4
VBUS: D5.1 D6.1 S1.6 U6.4 U6.8 | length 71.6
  Top Layer w0.254: D5.1 D6.1 77.673,225.933 78.207,226.466 82.169,226.466 83.083,225.806 ; S1.6 76.53,183.388 75.108,184.81 72.441,184.81 70.485,186.766 70.485,212.014 73.152,214.681 77.267,214.681 78.175,215.589 78.175,219.653 79.502,220.98 U6.4 78.765,221.996 78.511,222.25 78.511,223.926 81.204,223.926 83.083,225.806 ; U6.8 83.083,225.806
VCC: L2.2 R1.2 S1.1 S1.5 USB.1 | length 71.9
  Top Layer w0.254: S1.1 75.082,188.468 77.622,185.928 78.562,185.928 ; USB.1 75.565,209.707 75.565,203.327 79.267,199.625 ; 79.6,198.374 79.6,193.678 78.308,192.386 78.308,186.182 78.562,185.928 ; 79.6,198.472 79.6,199.292 79.267,199.625 ; v1(83.642,184.658) 82.372,185.928 S1.5 78.562,185.928 ; R1.2 84.404,198.435 84.404,198.907 83.687,199.625 79.267,199.625
  Bottom Layer w0.254: v1(83.642,184.658) 86.055,187.071 L2.2
pads on no net: ESP-03.2 ESP-03.6 MG1.0 MG2.0 MG3.0 MG4.0 S1.4 U1.2 U1.3 U1.4 U1.17 U1.18 U1.19 U1.25 U1.26 U1.27 U1.28 U1.29 U1.30 U1.31 U1.32 U1.33 U1.38 U1.39 U1.40 U1.46 U3.2 U3.3 U3.4 U3.5 U3.6 U3.7 U3.12 U3.14 U3.15 U3.16 U3.17 U3.19 U3.21 U3.22 U3.25 U5.3 U5.4 U6.1 USB.4 USB.6 USB.7 USB.8 Y1.3 Y1.4
copper on no net:
  other v2: 94.523,213.268 95.723,213.268 94.523,214.468 95.723,214.468

## Keep-outs
Keep-Out Layer:
  lines w0.254: 79.461,180 112.309,180 ; 79.501,229.999 46.228,263.271 41.402,263.271 37.719,259.588 37.719,254.508 68.834,223.393 68.834,186.563 37.592,155.321 37.592,150.495 41.275,146.812 46.355,146.812 79.502,179.959 ; 79.632,230 112.265,230 ; 112.268,229.997 145.415,263.144 150.495,263.144 154.178,259.461 154.178,254.635 122.936,223.393 122.936,186.563 154.051,155.448 154.051,150.368 150.368,146.685 145.542,146.685 112.27,179.958

## Silkscreen, mask and mechanical layers (free items; w line width, h text height)
Top Overlay:
  text "<-" at 87.376,227.33 h1.52 r270

## Text inside footprints (layer, text, board x,y; h text height)
S1: Top Overlay "1" at 73.406,189.611 h1